# EAGLE board design_block_rev3.4 (EAGLE 9.3.0)

No outline drawn. Coordinates in mm, seen from the top.
Copper layers (1*16): Top 0.035mm / dielectric 1.5mm / Bottom 0.035mm
Design rules "default": minimum track width 6mil, minimum drill 0.35mm, track to track 6mil, track to pad 6mil, pad to pad 6mil, via to via 6mil, smd to smd 6mil, copper to edge 40mil, drill to drill 6mil, minimum pad ring 10mil, minimum via ring 8mil, stop-mask expansion 4mil, vias tented up to drill 0mil, thermal gap 10mil

## Footprints (pad centres in the part's own frame; a part is rotated, then mirrored left to right if it is on the bottom)
.0603-B-NOSILK = smd 0.8 x 0.95: 1 -0.8,0; 2 0.8,0
.0402-B-NOSILK = smd 0.6 x 0.7: 1 -0.5,0; 2 0.5,0
LED-0603 = smd 1 x 1: A -0.877,0; C 0.877,0
SOT23-6 = smd 0.7 x 1: 1 -0.95,-1.3; 2 0,-1.3; 3 0.95,-1.3; 4 0.95,1.3; 5 0,1.3; 6 -0.95,1.3
SOT23 = smd 0.787 x 0.889: 1 -0.953,-1.143; 2 0.953,-1.143; 3 0,1.143
R1206 = smd 1.6 x 1.803: 1 -1.422,0; 2 1.422,0
2MM-TEST-POINT = drill 0.737: 1 0,0
QFN65P400X400X80-17T210 = smd 1.01 x 0.32: 1 -1.86,0.975; 2 -1.86,0.325; 3 -1.86,-0.325; 4 -1.86,-0.975; 9 1.86,-0.975; 10 1.86,-0.325; 11 1.86,0.325; 12 1.86,0.975 | smd 0.32 x 1.01: 5 -0.975,-1.86; 6 -0.325,-1.86; 7 0.325,-1.86; 8 0.975,-1.86; 13 0.975,1.86; 14 0.325,1.86; 15 -0.325,1.86; 16 -0.975,1.86 | smd 2.1 x 2.1: EPAD 0,0
SC70-5 = smd 0.4 x 0.7: 1 -0.65,-0.85; 2 0,-0.85; 3 0.65,-0.85; 4 0.65,0.85; 5 -0.65,0.85

## Placement (x,y rotation side)
C1  1u  [.0603-B-NOSILK]  4.98,11.68 90 bottom
C2  NP  [.0402-B-NOSILK]  11.51,9.7 0 bottom
C3  100n  [.0402-B-NOSILK]  7,25 90 bottom
C4  1u  [.0603-B-NOSILK]  16.75,28.24 180 bottom
C5  1u  [.0603-B-NOSILK]  11.25,28.24 0 bottom
D1  GREEN  [LED-0603]  15.09,12.99 270 bottom
D2  AMBER  [LED-0603]  11.28,16.24 270 bottom
Q1  MOSFET-PCH-SOT23-6  [SOT23-6]  2.2,12.64 90 bottom
Q2  MOSFET-PCH-SOT23-6  [SOT23-6]  10.55,12.54 0 bottom
Q3  PMV45EN  [SOT23]  6.93,14.34 270 bottom
Q4  PMV45EN  [SOT23]  14.19,6.47 90 bottom
Q5  DMP2240UDM  [SOT23-6]  14,32 180 bottom
R1  100m  [R1206]  2.68,9.09 180 bottom
R2  10k  [.0402-B-NOSILK]  2.24,15.06 180 bottom
R3  10k  [.0402-B-NOSILK]  8.13,11.48 90 bottom
R4  100  [.0402-B-NOSILK]  7.51,26.5 180 bottom
R5  2.7k  [.0402-B-NOSILK]  13.43,13.87 0 bottom
R6  0  [.0402-B-NOSILK]  8.37,3.26 270 bottom
R7  NP  [.0402-B-NOSILK]  8.82,4.72 0 bottom
R8  0  [.0402-B-NOSILK]  6.92,4.72 0 bottom
R9  10k  [.0402-B-NOSILK]  15.4,10.16 180 bottom
R10  NP  [.0402-B-NOSILK]  11.51,8.7 180 bottom
R11  10k  [.0402-B-NOSILK]  9.6,15.33 0 bottom
R12  NP  [.0402-B-NOSILK]  13.41,8.7 0 bottom
R13  NP  [.0402-B-NOSILK]  6.4,3.71 180 bottom
R14  NP  [.0402-B-NOSILK]  15,18 270 bottom
R15  NP  [.0402-B-NOSILK]  14,18 90 bottom
R16  NP  [.0402-B-NOSILK]  15,21 270 bottom
R17  NP  [.0402-B-NOSILK]  14,21 90 bottom
R18  NP  [.0402-B-NOSILK]  15,24 270 bottom
R19  NP  [.0402-B-NOSILK]  14,24 90 bottom
R20  2.7k  [.0402-B-NOSILK]  9.6,16.34 0 bottom
R21  NP  [.0402-B-NOSILK]  17,18 90 bottom
R22  NP  [.0402-B-NOSILK]  16,18 270 bottom
R23  NP  [.0402-B-NOSILK]  17,21 90 bottom
R24  NP  [.0402-B-NOSILK]  16,21 270 bottom
R25  NP  [.0402-B-NOSILK]  17,24 90 bottom
R26  NP  [.0402-B-NOSILK]  16,24 270 bottom
R27  10k  [.0402-B-NOSILK]  11.2,4.71 180 bottom
R28  10k  [.0402-B-NOSILK]  8,25 90 bottom
R29  47k  [.0402-B-NOSILK]  3,21 270 bottom
R30  47k  [.0402-B-NOSILK]  4,21 270 bottom
R31  330k  [.0402-B-NOSILK]  15.45,29.49 0 bottom
R32  1M  [.0402-B-NOSILK]  17.35,29.49 180 bottom
R33  100  [.0402-B-NOSILK]  14,35 270 bottom
R34  10k  [.0402-B-NOSILK]  15,35 270 bottom
R35  330k  [.0402-B-NOSILK]  12.55,29.49 180 bottom
R36  1M  [.0402-B-NOSILK]  10.65,29.49 0 bottom
R37  100  [.0402-B-NOSILK]  14,29 90 bottom
R38  10k  [.0402-B-NOSILK]  13,35 270 bottom
TP1  TEST-POINT  [2MM-TEST-POINT]  5.43,25.02 0 bottom
TP3  TEST-POINT  [2MM-TEST-POINT]  11.49,7.19 0 top
TP5  TEST-POINT  [2MM-TEST-POINT]  5.79,21.36 0 bottom
TP6  TEST-POINT  [2MM-TEST-POINT]  4.42,4.24 270 bottom
TP7  TEST-POINT  [2MM-TEST-POINT]  11,35 270 bottom
TP8  TEST-POINT  [2MM-TEST-POINT]  13.43,10.24 0 bottom
TP9  TEST-POINT  [2MM-TEST-POINT]  13.42,12.22 0 bottom
TP10  TEST-POINT  [2MM-TEST-POINT]  6.67,11.55 0 top
TP11  TEST-POINT  [2MM-TEST-POINT]  6.4,2.21 0 top
TP12  TEST-POINT  [2MM-TEST-POINT]  10.31,3.2 0 top
TP13  TEST-POINT  [2MM-TEST-POINT]  7.59,17.13 0 bottom
TP14  TEST-POINT  [2MM-TEST-POINT]  12.22,3.21 0 top
TP18  TEST-POINT  [2MM-TEST-POINT]  10,25 0 bottom
TP20  TEST-POINT  [2MM-TEST-POINT]  12,25 0 bottom
TP22  TEST-POINT  [2MM-TEST-POINT]  17,35 270 bottom
U1  MAX4211FETE  [QFN65P400X400X80-17T210]  8,8 270 bottom
U2  MAX7310ATE  [QFN65P400X400X80-17T210]  9.72,21.02 0 bottom
U3  MIC842LYC5  [SC70-5]  17,32 0 bottom
U4  MIC842LYC5  [SC70-5]  11,32 0 bottom

## Library data of the parts
C1 C4 C5 = oresat-rcl; DIS: Digi-Key; DPN: 311-1446-1-ND; MFR: Yageo; MPN: CC0603KRX7R7BB105
C2 = rcl_custom
C3 = rcl_custom; DIS: Digi-Key; DPN: 1276-1001-1-ND; MFR: Samsung; MPN: CL05B104KO5NNNC
D1 = SparkFun-LED; DIS: Digi-Key; DPN: 511-1584-1-ND; MFR: Rohm; MPN: SML-E12M8WT86
D2 = SparkFun-LED; DIS: Digi-Key; DPN: 1830-1064-1-ND; MFR: Inolux; MPN: IN-S63AT5A
Q1 Q2 = Q-MOSFET-PCH-SOT23-6; DIS: Digi-Key; DPN: DMP3050LVT-7DICT-ND; MFR: Diodes Inc; MPN: DMP3050LVT-7
Q3 Q4 = Tova; DIS: Digi-Key; DPN: 1727-2307-1-ND; MFR: Nexperia; MPN: PMV45EN2R
Q5 = Q-MOSFET-PCH-dual-SOT23-6; DIS: Digi-Key; DPN: DMP2240UDMDICT-ND; MFR: Diodes Inc; MPN: DMP2240UDM
R1 = rcl; DIS: Digi-Key; DPN: CSR1206FTR100CT-ND; MFR: Stackpole; MPN: CSR1206FTR100; SPICEPREFIX: R
R2 R3 R9 R11 R27 R28 R34 R38 = rcl_custom; DIS: Digi-Key; DPN: 311-10.0KLRCT-ND; MFR: Yageo; MPN: RC0402FR-0710KL
R4 R33 R37 = rcl_custom; DIS: Digi-Key; DPN: 311-100LRCT-ND; MFR: Yageo; MPN: RC0402FR-07100RL
R5 R20 = rcl_custom; DIS: Digi-Key; DPN: A129632CT-ND; MFR: TE Connectivity; MPN: CRGCQ0402F2K7
R6 R8 = rcl_custom; DIS: Digi-Key; DPN: 311-0.0JRCT-ND; MFR: Yageo; MPN: RC0402JR-070RL
R7 R10 R12-R19 R21-R26 = rcl_custom; DIS: Digi-Key; DPN: 1276-4275-1-ND; MFR: Samsung; MPN: RC1005F6653CS
R29 R30 = rcl_custom; DIS: Digi-Key; DPN: 311-47.0KLRCT-ND; MFR: Yageo; MPN: RC0402FR-0747KL
R31 R35 = rcl_custom; DIS: Digi-Key; DPN: 749-1575-1-ND; MFR: Vishay; MPN: MCS04020C3303FE000
R32 R36 = rcl_custom; DIS: Digi-Key; DPN: 311-1.00MLRCT-ND; MFR: Yageo; MPN: RC0402FR-071ML
TP1 TP3 TP5-TP14 TP18 TP20 TP22 = Tova
U1 = U-Maxim-MAX4211-power-monitor; DIS: Digi-Key; DPN: MAX4211FETE+-ND; MFR: Maxim; MPN: MAX4211FETE
U2 = U-Maxim-MAX7310-I2C-GPIO-expander; DIS: Digi-Key; DPN: MAX7310ATE+-ND; MFR: Maxim; MPN: MAX7310ATE
U3 U4 = U-Microchip-MIC842-Comparator

## Nets
!FAULT_Q_: Q4.3 R9.1 TP8.1 U2.7
AD0_Q_: R18.2 R19.1 R25.1 R26.2 U2.1
AD1_Q_: R16.2 R17.1 R23.1 R24.2 U2.2
AD2_Q_: R14.2 R15.1 R21.1 R22.2 U2.3
BOOT0_Q_: U2.10
CB-RESET_Q_: R27.2 TP14.1 U1.9 U2.9
CB_CTRL_Q_: Q2.3 Q4.1 R3.1 TP3.1 U1.3 U1.4 U1.6
GND: C1.2 C3.1 C4.2 C5.2 D1.C D2.C Q3.2 Q4.2 R7.1 R11.1 R12.1 R13.1 R22.1 R24.1 R26.1 R27.1 R34.1 R38.1 U1.7 U1.EPAD U2.6 U2.EPAD U3.2 U4.2
IOUT_Q_: R6.2 U1.14
MAX4211-3V3_Q_: C1.1 TP10.1 U1.1 U2.12
N$270: D1.A R5.1
N$385: R29.1 R30.1 TP5.1 U2.11
N$398: Q2.4 R1.2 R3.2 U1.15
N$400: C4.1 R31.1 R32.1 U3.1
N$401: C5.1 R35.1 R36.1 U4.1
N$479: Q5.2 R33.2
N$480: Q5.3 R34.2 TP22.1 U3.4
N$575: D2.A R20.1
N$579: Q5.5 R37.2
N$580: Q5.1 R38.2 TP7.1 U4.4
N$589: R28.1 U2.13
N$590: Q1.3 Q3.3 R2.1
N$593: Q1.1 Q1.2 Q1.5 Q1.6 R1.1 U1.16
N$596: R6.1 R7.2 TP12.1 U1.10
N$597: R8.1 R13.2 TP11.1 U1.11
N$599: R8.2 U1.8 U1.12
N$603: C2.1 R10.2 R12.2
N$604: R10.1 U1.5
ON/!OFF_Q_: Q3.1 R11.2 R20.2 TP13.1 U2.8
OPD_PWR: R4.1
OPD_SCL: R33.1
OPD_SDA: R37.1
PB6/SCL_Q_: R30.2 U2.4
PB7/SDA_Q_: R29.2 U2.5
PEN-SCL-FILT_Q_: Q5.4 R14.1 R16.1 R18.1 R31.2 TP18.1 U2.15
PEN-SDA-FILT_Q_: Q5.6 R15.2 R17.2 R19.2 R35.2 TP20.1 U2.16
POUT_Q_: TP6.1 U1.13
VBUS: Q1.4 R2.2
VBUSP_Q_: C2.2 Q2.1 Q2.2 Q2.5 Q2.6 R5.2 TP9.1
VPD_Q_: C3.2 R4.2 R9.2 R21.2 R23.2 R25.2 R28.2 R32.2 R36.2 TP1.1 U2.14 U3.5 U4.5

## Tracks (layer width: path | path; a pad name or v marks a point on that pad's centre or on a via)
!FAULT_Q_  (3 unrouted)
AD0_Q_  (4 unrouted)
AD1_Q_  (4 unrouted)
AD2_Q_  (4 unrouted)
CB-RESET_Q_  (3 unrouted)
CB_CTRL_Q_  (6 unrouted)
GND  (23 unrouted)
IOUT_Q_  (1 unrouted)
MAX4211-3V3_Q_  (3 unrouted)
N$270  (1 unrouted)
N$385  (3 unrouted)
N$398  (3 unrouted)
N$400  (3 unrouted)
N$401  (3 unrouted)
N$479  (1 unrouted)
N$480  (3 unrouted)
N$575  (1 unrouted)
N$579  (1 unrouted)
N$580  (3 unrouted)
N$589  (1 unrouted)
N$590  (2 unrouted)
N$593  (5 unrouted)
N$596  (3 unrouted)
N$597  (3 unrouted)
N$599  (2 unrouted)
N$603  (2 unrouted)
N$604  (1 unrouted)
ON/!OFF_Q_  (4 unrouted)
PB6/SCL_Q_  (1 unrouted)
PB7/SDA_Q_  (1 unrouted)
PEN-SCL-FILT_Q_  (6 unrouted)
PEN-SDA-FILT_Q_  (6 unrouted)
POUT_Q_  (1 unrouted)
VBUS  (1 unrouted)
VBUSP_Q_  (6 unrouted)
VPD_Q_  (12 unrouted)